# EAGLE board Spectacular Juttuli-Wluff (EAGLE 9.7.0)

Size 41.63 x 90.93 mm. Coordinates in mm from the lower left corner, seen from the top.
Outline: 0,0 41.63,0 41.63,90.93 0,90.93 0,0
Copper layers (1*16): Top 0.035mm / dielectric 1.5mm / Bottom 0.035mm
Design rules "default": minimum track width 6mil, minimum drill 0.35mm, track to track 6mil, track to pad 6mil, pad to pad 6mil, via to via 6mil, smd to smd 6mil, copper to edge 40mil, drill to drill 6mil, minimum pad ring 10mil, minimum via ring 8mil, stop-mask expansion 4mil, vias tented up to drill 0mil, thermal gap 10mil

## Footprints (pad centres in the part's own frame; a part is rotated, then mirrored left to right if it is on the bottom)
BATTERY-GENERIC = drill 1.118 pad 3.15 octagon: + 2.54,0; - -2.54,0
DG01D = drill 1.118 pad 3.15 octagon: + 2.54,0; - -2.54,0

## Placement (x,y rotation side)
BAT2  3V  [BATTERY-GENERIC]  8.26,8.26 0 top
M1  MOTOR_DG01D  [DG01D]  28.93,16.64 180 top

## Library data of the parts
BAT2 M1 = Tinkercad

## Nets
BAT2+: BAT2.+ M1.+
BAT2-: BAT2.- M1.-

## Tracks (layer width: path | path; a pad name or v marks a point on that pad's centre or on a via)
BAT2+  (1 unrouted)
BAT2-  (1 unrouted)